# Altium PCB Sensor-Board.PcbDoc
Units mm, origin at the board's own origin, x right, y up, seen from the top; angles counter-clockwise.
Board outline 152.4 x 101.6 mm, 2 copper layers (Top Layer, Bottom Layer); 30 components, 25 nets, 110 pads, 15 vias.
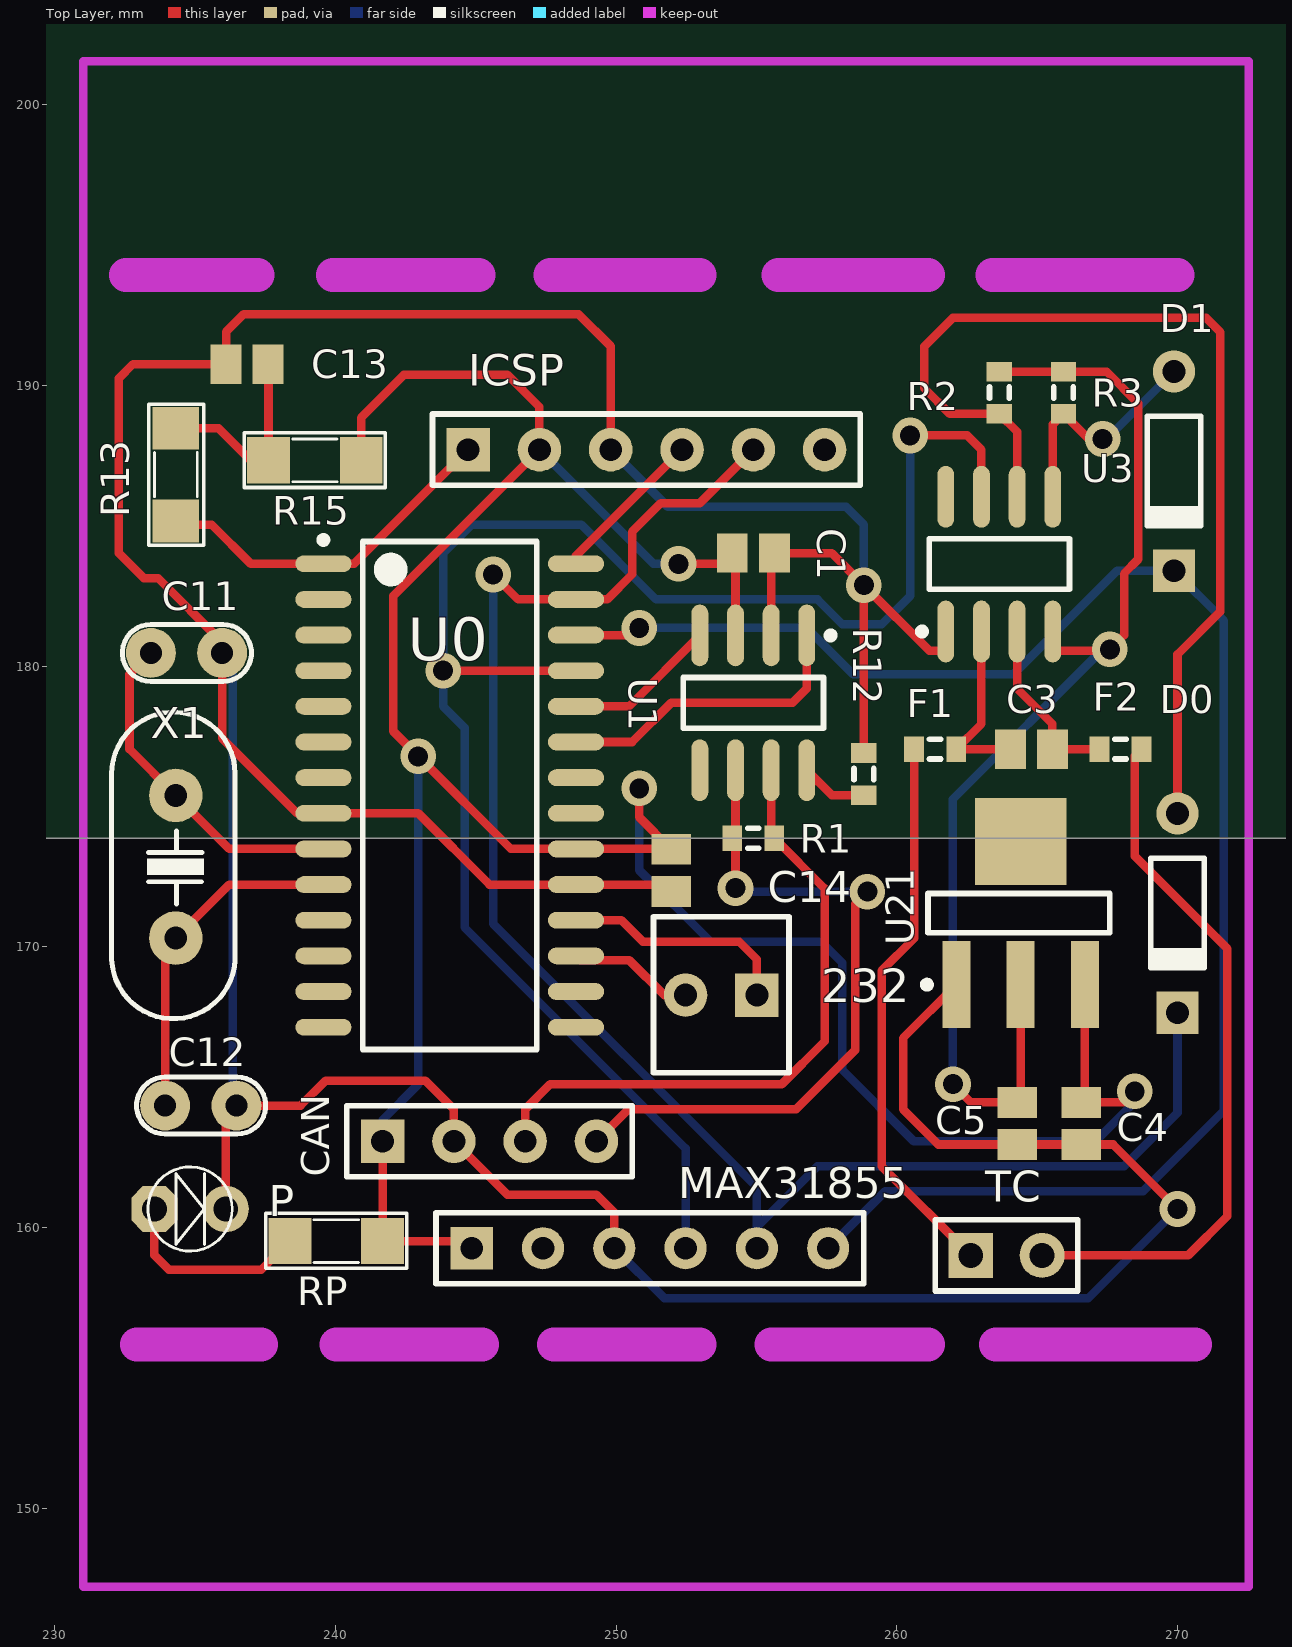
[diagram p0: Top Layer view]
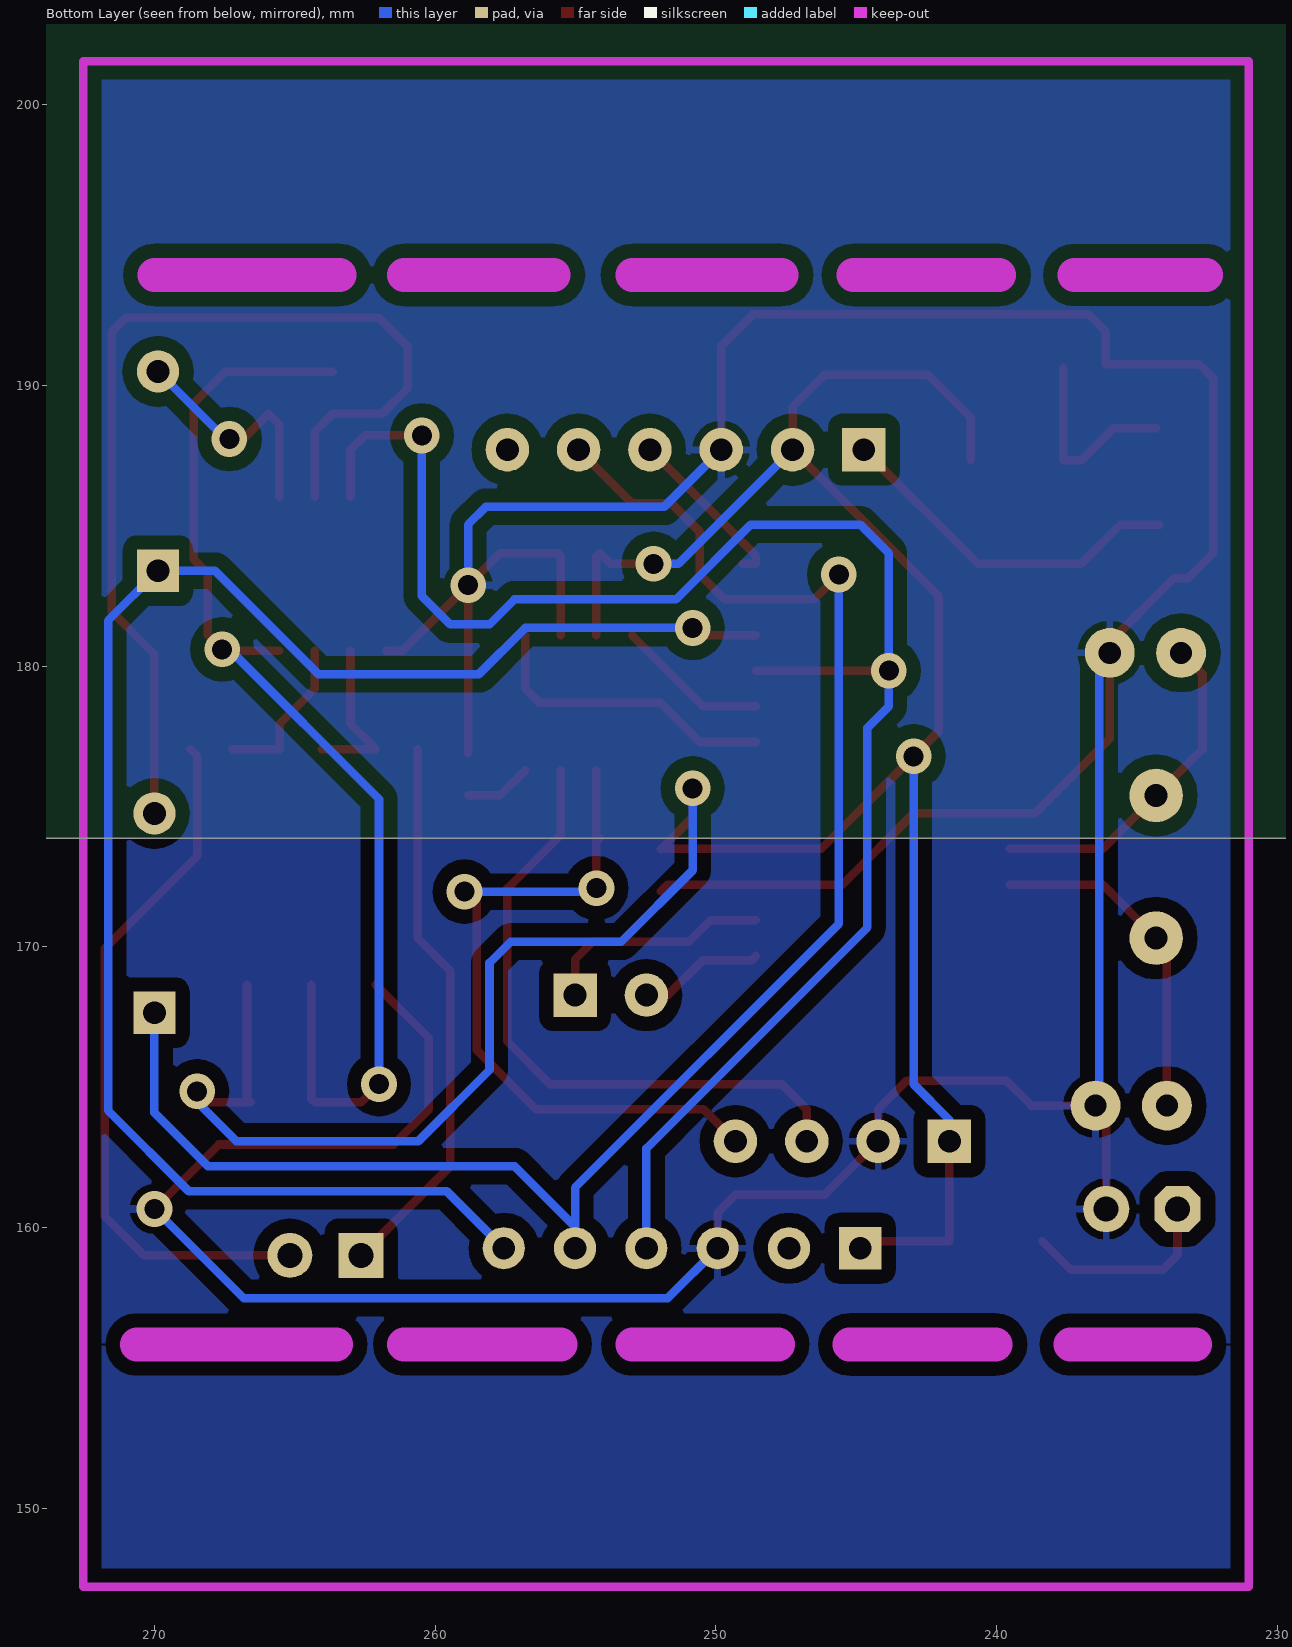
[diagram p1: Bottom Layer view, seen from below]

## Layer stack, top to bottom
Top Solder: solder mask 0.0102, Solder Resist, Dk 3.5
Top Layer: signal copper 0.0356
Dielectric 1: dielectric 0.32, FR-4, Dk 4.8
Bottom Layer: signal copper 0.0356
Bottom Solder: solder mask 0.0102, Solder Resist, Dk 3.5

## Board outline
145.923,173.863 298.323,173.863 298.323,275.463 145.923,275.463

## Design rules (kind name [scope] priority, off if disabled: settings)
Clearance "PolyGon Pour Clearance" [InPolyGon] p1: gap=0.508 ignorepadtopadclearanceinfootprint=FALSE except(0: Arc-Hole Track-Hole SMDPad-Hole THPad-Hole Via-Hole Fill-Hole Poly-Hole Region-Hole Text-Hole)
Clearance [All] p2: gap=0.356 ignorepadtopadclearanceinfootprint=FALSE except(0: Arc-Hole Track-Hole SMDPad-Hole THPad-Hole Via-Hole Fill-Hole Poly-Hole Region-Hole Text-Hole)
PolygonConnect [All] p1: connectstyle=Relief reliefconductorwidth=0.254 reliefentries=4 polygonreliefangle="90 Angle" airgapwidth=0.254
RoomDefinition max31855_sensorion_board [InComponentClass('max31855_sensorion_board')] p1: confinementstyle=ConfineIn formatcopy=TRUE lockcomponents=FALSE outline 299.466,175.387 303.022,175.387 303.022,180.213 299.466,180.213
RoutingVias [All] p1: holewidth=0.711 width=1.27 viastyle="Through Hole" minholewidth=0.711 minwidth=1.27 maxholewidth=0.711 maxwidth=1.27
SolderMaskExpansion [All] p1: expansion=0.102
Width VCC1 [(InNet('VCC1') AND InNet('VCC'))] p1: maxlimit=0.356 minlimit=0.356 preferedwidth=0.356
Width [All] p2: maxlimit=0.305 minlimit=0.305 preferedwidth=0.305
30 further rules are at their usual default settings.

## Components (designator, comment, footprint, x,y, rotation, side; value= is the part's Value field where it differs from the comment)
232 "Header2" HDR2 255.016,168.275 r180 top
C1 "Cap Pol3" C0805 254.889,184.023 r0 top value=0.1uF
C3 "Cap Pol3" C0805 264.795,177.038 r0 top value=0.1uF
C4 "Cap Pol3" C0805 266.573,163.703 r270 top value=10uF
C5 "Cap Pol3" C0805 264.287,163.703 r270 top value=10uF
C11 "22pF" CN1 234.696,180.467 r0 top value=33pF
C12 "22pF" CN1 235.204,164.338 r0 top value=33pF
C13 "Cap Pol3" C0805 236.855,190.754 r180 top value=0.1uF
C14 "Cap Pol3" C0805 251.968,172.72 r270 top value=0.1uF
CAN "Header 4" HDR1X4 241.681,163.068 r0 top
D0 "Diode 1N4148" DO-35 270.002,171.196 r270 top
D1 "Diode 1N4148" DO-35 269.875,186.944 r270 top
F1 "Res3" J1-0603 261.366,177.038 r180 top value=0805
F2 "Res3" J1-0603 267.97,177.038 r0 top value=0805
ICSP "Header 6" HDR1X6#1 244.729,187.706 r0 top
MAX31855 "Header 6" HDR1X6#2 244.856,159.258 r0 top
P "LED" LED-3MM-YELLOW 233.553,160.655 r0 top value="LED 3 ly Single Colour"
R1 "Res3" J1-0603 254.889,173.863 r0 top value=120
R2 "Res3" J1-0603 263.652,189.738 r90 top value=10k
R3 "Res3" J1-0603 265.938,189.738 r90 top value=10k
R12 "Res3" J1-0603 258.826,176.149 r90 top value=0
R13 "470" SM-RES-1206 234.315,188.468 r270 top value="R1/4W - 1K"
R15 "10k" SM-RES-1206 237.617,187.325 r0 top value="R1/4W - 1K"
RP "10k" SM-RES-1206 238.379,159.512 r0 top value="R1/4W - 1K"
TC "JP2" JP2-D1T 262.636,159.004 r0 top
U0 "PIC18F2480T-I/SO" SOIC-SO28_L 244.072,175.387 r0 top
U1 "MCP2551-E/SN" SOIC-SN8_N 254.889,178.689 r270 top
U3 "Component_1" "SOP8 - duplicate" 267.716,179.946 r90 top
U21 "Component_1" SOT229P700X460-4N 264.414,171.196 r90 top
X1 "12Mhz" XT2 234.315,172.847 r90 top value=4Mhz

## Footprints (in the part's own frame and the unit in brackets; to place one, negate y for a bottom-side part, rotate by r counter-clockwise, add the part's x,y. Pads: shape width x height; smd on the part's side, far side on the other; paste and mask are expansions set on the pad)
C0805 [mm] "Chip Capacitor, Body 2.0x1.3mm, IPC High Density"
  rect 1.1x1.4 smd: 1(-0.75,0) 2(0.75,0)
  body extent -1.1,-0.72 1.1,0.72, height 1.4
CN1 [mil]
  round 70 hole 31: 1(-50,0) 2(50,0)
  silkscreen extent -90,-40 91,40, body extent -115,-33 115,33, height 265
DO-35 [mm] "Diode, Axial; Body 3.8 x 1.9 mm (LxDia. max), Lead Dia. 0.53 mm (max)"
  round 1.5 hole 0.813: 1(-3.55,0)
  rect 1.5x1.5 hole 0.813: 2(3.55,0)
  silkscreen extent -1.95,-0.95 2.05,0.95
HDR1X4 [mil] "Connector; Header; 4 Position"
  rect 61x61 hole 32: 1(0,0)
  round 61 hole 32: 2(100,0) 3(200,0) 4(300,0)
  silkscreen extent -50,-50 350,50
HDR1X6#1 [mil] "Connector; Header; 6 Position"
  rect 61x61 hole 32: 1(0,0)
  round 61 hole 32: 2(100,0) 3(200,0) 4(300,0) 5(400,0) 6(500,0)
  silkscreen extent -50,-50 550,50
HDR1X6#2 [mil] "Connector; Header; 6 Position"
  rect 59.06x59.06 hole 32: 1(0,0)
  round 59.06 hole 32: 2(100,0) 3(200,0) 4(300,0) 5(400,0) 6(500,0)
  silkscreen extent -50,-50 550,50
HDR2 [mil] "Connector; Header; 2 Position"
  rect 61x61 hole 32: 1(0,0)
  round 61 hole 32: 2(100,0)
  silkscreen extent -45,-110 145,109, body extent -50,-115 150,113, height 461
J1-0603 [mm] "Chip Resistor, Body 1.6x0.8mm, IPC High Density"
  rect 0.7x0.9 smd: 1(-0.75,0) 2(0.75,0)
  silkscreen extent -0.2,-0.35 0.2,0.35, body extent -0.85,-0.48 0.85,0.48, height 0.9
JP2-D1T [mm] "2 pins, 1 row, straight, gold plating"
  rect 1.6x1.6 hole 0.889: 1(0,0)
  round 1.6 hole 0.889: 2(2.54,0)
  silkscreen extent -1.27,-1.27 3.81,1.27, body extent -1.27,-1.27 3.81,1.27, height 8.54
LED-3MM-YELLOW [mil]
  oct 65x65 hole 35: 1(0,0)
  round 65 hole 35: 2(100,0)
  silkscreen extent -9,-59 109,59, body extent -27,-77 117,80, height 181
SM-RES-1206 [mil]
  rect 60x65 smd: 1(0,0) 2(130,0)
  silkscreen extent -34,-38 164,39, body extent 2,-31 128,32, height 40
SOIC-SN8_N [mm] "SOIC, 8-Leads, Body 4.9x3.8mm, Pitch 1.27mm, IPC Medium Density"
  oval 2.2x0.6 smd: 1(-2.4,1.905) 2(-2.4,0.635) 3(-2.4,-0.635) 4(-2.4,-1.905) 5(2.4,-1.905) 6(2.4,-0.635) 7(2.4,0.635) 8(2.4,1.905)
  silkscreen extent -2.52,-2.5 0.9,2.88, body extent -2,-2.5 2,2.5, height 1.75
SOIC-SO28_L [mm] "SOIC, 28-Leads, Body 17.9x7.5mm, Pitch 1.27mm, IPC High Density"
  oval 2x0.6 smd: 1(-4.5,8.255) 2(-4.5,6.985) 3(-4.5,5.715) 4(-4.5,4.445) 5(-4.5,3.175) 6(-4.5,1.905) 7(-4.5,0.635) 8(-4.5,-0.635) 9(-4.5,-1.905) 10(-4.5,-3.175) 11(-4.5,-4.445) 12(-4.5,-5.715) 13(-4.5,-6.985) 14(-4.5,-8.255) 15(4.5,-8.255) 16(4.5,-6.985) 17(4.5,-5.715) 18(4.5,-4.445) 19(4.5,-3.175) 20(4.5,-1.905) 21(4.5,-0.635) 22(4.5,0.635) 23(4.5,1.905) 24(4.5,3.175) 25(4.5,4.445) 26(4.5,5.715) 27(4.5,6.985) 28(4.5,8.255)
  silkscreen extent -4.62,-9.05 3.1,9.23, body extent -3.8,-9.06 3.8,9.06, height 2.65
"SOP8 - duplicate" [mm]
  oval 2.2x0.6 smd: 1(1.283,5.969) 2(1.283,4.699) 3(1.283,3.429) 4(1.283,2.159) 5(6.083,2.159) 6(6.083,3.429) 7(6.083,4.699) 8(6.083,5.969)
  silkscreen extent 1.16,1.56 4.58,6.94, body extent 1.68,1.56 5.68,6.56, height 1.75
SOT229P700X460-4N [mm] "SOT223, 4-Leads, Body 10,90x7,00mm (avg), Pitch 2,29mm, IPC Medium Density"
  rect 3.1x1 smd: 1(-2.55,2.29) 2(-2.55,0) 3(-2.55,-2.29)
  rect 3.1x3.25 smd: 4(2.55,0)
  silkscreen extent -2.67,-3.17 0.7,3.46, body extent -1.85,-3.43 1.85,3.17, height 4.6
XT2 [mil] "Footpin for Crystal 2 pin"
  round 75 hole 32: 1(-100,0) 2(100,0)
  silkscreen extent -213,-83 217,90, body extent -216,-87 216,90, height 144

## Part data
232: "Header IDC, 2 x 1 Pin Vertical 2.54mm Pitch (Non-Boxed, Male)", Manufacturer="Würth Elektronik eiSos GmbH", partNo=613002143121, ComponentLink1 Description=Manufacturer, ComponentLink1URL=http://www.we-online.com, ComponentLink2 Description=Datasheet, ComponentLink2URL=http://katalog.we-online.de/em/datasheet/6130xx143121.pdf, Created by="Karrer Zheng", Created Date="29 March 2013", NoPins=02
C1 C3 C4 C5 C13 C14: "Polarized Capacitor (Surface Mount)", LatestRevisionDate=29-May-2009, LatestRevisionNote="IPC-7351 Footprint Added.", PackageDescription="Chip Capacitor", PackageReference=C0805, Published=8-Jun-2000, Publisher="Altium Limited"
C11 C12: library part CN0, "Cremic For Xtal 1pF => 100pF"
CAN: "Header, 4-Pin", LatestRevisionDate=17-Jul-2002, LatestRevisionNote="Re-released for DXP Platform.", Publisher="Altium Limited"
D0 D1: "High Conductance Fast Diode", Code_JEDEC=DO-204-AH, ComponentLink1Description="Manufacturer Link", ComponentLink1URL=http://www.fairchildsemi.com/, ComponentLink2Description=Datasheet, ComponentLink2URL=http://www.fairchildsemi.com/ds/1N%2F1N4148.pdf, DatasheetVersion=1997, LatestRevisionDate=17-Jul-2002, LatestRevisionNote="Re-released for DXP Platform.", PackageDescription="Diode, Axial; Body 3.8 x 1.9 mm (LxDia. max), Lead Dia. 0.53 mm (max)", PackageReference=DO-35, Published=8-Jun-2000, Publisher="Altium Limited"
F1 F2 R1 R2 R3 R12: "Resistor", LatestRevisionDate=29-May-2009, LatestRevisionNote="IPC-7351 Footprint Added.", PackageDescription="Chip Resistor", PackageReference=J1-0603, Published=8-Jun-2000, Publisher="Altium Limited"
ICSP MAX31855: "Header, 6-Pin", LatestRevisionDate=17-Jul-2002, LatestRevisionNote="Re-released for DXP Platform.", Publisher="Altium Limited"
P: "LED Single colour Green and Red"
R13 R15 RP: library part R, "Resistor 1/4W"
TC: "WR-PHD 2.54 mm Angled Socket Header", Manufacturer="Würth Elektronik eiSos GmbH", partNo=613002143121, ComponentLink1 Description=Manufacturer, ComponentLink1URL=http://www.we-online.com, ComponentLink2 Description=Datasheet, ComponentLink2URL=http://katalog.we-online.de/em/datasheet/6130xx143121.pdf, Created by="Karrer Zheng", Created Date="29 March 2013", NoPins=02
U0: "Enhanced Flash Microcontroller with ECAN Technology, 10-Bit A/D and nanoWatt Technology, 16K Flash, 28-Pin SOIC, Industrial Temperature Range, Tape and Reel", Supplier Part Number 1=PIC18F2480T-I/SO-ND, Code_JEDEC=MS-013, ComponentLink1Description=Datasheet, ComponentLink1URL=http://ww1.microchip.com/downloads/en/DeviceDoc/39637d.pdf, ComponentLink2Description="Packaging Specification", ComponentLink2URL=http://www.microchip.com/stellent/groups/techpub_sg/documents/packagingspec/en012702.pdf, ComponentLink3Description="Microchip.com Home", ComponentLink3URL=http://www.microchip.com/, DatasheetVersion="revD, Nov-2009", LatestRevisionDate=02-Dec-2009, LatestRevisionNote="Updated to datasheet revision D, Nov-2009", PackageDescription="28-Lead Plastic Small Outline (SO) - Wide 7.50mm Body [SOIC]", PackageReference=SOIC-SO28, PackageVersion="revBB, Aug-2009", Published=29-Jan-2009, Publisher="Altium Limited", Supplier 1=Digi-Key
U1: "High-Speed CAN Transceiver, 8-Pin SOIC, Extended Temperature", Supplier Part Number 1=MCP2551-E/SN-ND, Code_IPC=SOIC127P600-8, Code_JEDEC=MS-012, ComponentLink1Description=Datasheet, ComponentLink1URL=http://ww1.microchip.com/downloads/en/DeviceDoc/21667E.pdf, ComponentLink2Description="Packaging Specification", ComponentLink2URL=http://www.microchip.com/stellent/groups/techpub_sg/documents/packagingspec/en012702.pdf, ComponentLink3Description="Microchip.com Home", ComponentLink3URL=http://www.microchip.com/, DatasheetVersion="revE, Jan-2007", PackageDescription="8-Lead Plastic Small Outline (SN) - Narrow, 3.90mm Body [SOIC]", PackageReference=SOIC-SN8, PackageVersion="revBB, Aug-2009", Published=29-Jan-2009, Publisher="Altium Limited", Supplier 1=Digi-Key, Supplier 2=Farnell, Supplier 3=Farnell, Supplier Part Number 2=1467746, Supplier Part Number 3=4687887
X1: library part XT2, "Crystal, 32.768 KHz, -40 to 85 degC, 3.2 x 1.5 x 0.9 mm SMD"

## Via types
v1: diameter 1.27, hole 0.711, Top Layer to Bottom Layer, 15 vias

## Nets (pads, with @x,y where several pads share a name; then routed paths per layer and width w, separated by ;. In a path a pad name is that pad's centre, name@x,y a point inside that pad or via, vN(x,y) a via of type N, cw(c..) or ccw(c..) an arc to the next point about the centre after c; other vN are vias at no path point)
3.3V: C5.1 R2.2 R3.2 U3.4 U21.2 | length 41.4
  Top Layer w0.305: v1(262.001,165.1) 262.648,164.453 C5.1 264.414,164.58 U21.2 ; R2.2 R3.2 267.474,190.488 268.605,189.357 268.605,183.801 268.097,183.293 268.097,181.102 v1(267.589,180.594) 267.538,180.543 U3.4@265.557,180.543
  Bottom Layer w0.305: v1(262.001,165.1) 262.001,175.26 267.335,180.594 v1(267.589,180.594)
GND1: C1.2 C4.2 C5.2 C11.2 C12.2 C13.2 C14.2 CAN.2 ICSP.3 MAX31855.3 P.2 R12.2 U0.8 U0.19 U1.2 U3.1 U21.1 | length 160.5
  Top Layer w0.305: P.2 236.093,163.957 C12.2 238.76,164.338 239.649,165.227 243.205,165.227 244.221,164.211 CAN.2 246.126,161.163 249.301,161.163 249.936,160.528 MAX31855.3 ; U0.8@239.522,174.752 238.633,174.752 235.966,177.419 C11.2 235.966,180.848 233.68,183.134 233.172,183.134 232.283,184.023 232.283,190.246 232.791,190.754 C13.2 236.105,191.909 236.728,192.532 248.666,192.532 249.809,191.389 ICSP.3 ; U0.8 242.951,174.752 245.491,172.212 U0.19 251.726,172.212 C14.2 ; U1.2 255.524,183.908 C1.2 257.683,184.023 v1(258.826,182.88) ; R12.2 v1(258.826,182.88) ; U3.1@261.747,180.543 261.163,180.543 v1(258.826,182.88) ; U21.1 260.223,166.745 260.223,164.211 261.481,162.953 C5.2 C4.2 267.704,162.953 v1(270.002,160.655)
  Bottom Layer w0.305: C11.2 236.347,180.086 236.347,165.227 ; ICSP.3 251.841,185.674 258.191,185.674 258.826,185.039 v1(258.826,182.88) ; MAX31855.3 251.714,157.48 266.827,157.48 v1(270.002,160.655)
Net232_1: 232.1 U0.18 | length 8.3
  Top Layer w0.305: U0.18 250.19,170.942 250.952,170.18 254.381,170.18 255.016,169.545 232.1
Net232_2: 232.2 U0.17 | length 4.5
  Top Layer w0.305: U0.17 248.724,169.52 250.469,169.52 251.714,168.275 232.2
NetC3_1: C3.1 F1.1 U3.2 | length 5.8
  Top Layer w0.305: U3.2@263.017,180.543 263.017,177.939 F1.1 C3.1
NetC3_2: C3.2 F2.1 U3.3 | length 5.7
  Top Layer w0.305: U3.3@264.287,180.543 264.287,179.197 265.545,177.939 C3.2 F2.1
NetC11_1: C11.1 U0.9 X1.2 | length 12.1
  Top Layer w0.305: C11.1 232.664,179.705 232.664,177.038 X1.2 236.22,173.482 U0.9@239.522,173.482
NetC12_1: C12.1 U0.10 X1.1 | length 12.1
  Top Layer w0.305: C12.1 233.934,169.926 X1.1 236.22,172.212 U0.10@239.522,172.212
NetC13_1: C13.1 R13.1 R15.1 | length 7.1
  Top Layer w0.305: R13.1 235.839,188.468 236.982,187.325 R15.1 C13.1@237.617,190.627
NetCAN_3: CAN.3 R1.2 U1.7 | length 23.3
  Top Layer w0.305: CAN.3 246.761,164.211 247.65,165.1 255.905,165.1 257.429,166.624 257.429,172.073 R1.2 255.524,173.978 U1.7
NetCAN_4: CAN.4 R1.1 U1.6 | length 25.4
  Top Layer w0.305: CAN.4 250.444,164.211 256.413,164.211 258.521,166.319 258.521,171.526 v1(258.953,171.958) ; v1(254.254,172.085) 254.254,173.748 R1.1 254.254,173.978 U1.6
  Bottom Layer w0.305: v1(254.254,172.085) 254.381,171.958 v1(258.953,171.958)
NetD0_1: D0.1 R2.1 U3.6 | length 36.7
  Top Layer w0.305: U3.6 264.287,188.353 R2.1 261.886,188.988 260.985,189.889 260.985,191.389 262.001,192.405 271.018,192.405 271.526,191.897 271.526,181.938 270.002,180.414 D0.1
NetD0_2: D0.2 ICSP.5 MAX31855.5 U0.27 | length 61
  Top Layer w0.305: v1(245.618,183.261) 246.507,182.372 U0.27 249.682,182.372 250.571,183.261 250.571,184.785 251.587,185.801 252.984,185.801 ICSP.5 ; ICSP.5@254.394,187.592 ICSP.5@254.508,187.706
  Bottom Layer w0.305: v1(245.618,183.261) 245.618,170.815 255.016,161.417 255.016,160.02 ; MAX31855.5 255.016,160.02 ; D0.2 270.002,164.084 268.097,162.179 257.175,162.179 255.016,160.02
NetD1_1: D1.1 R3.1 U3.5 | length 8.8
  Top Layer w0.305: U3.5 265.557,188.607 R3.1 266.966,187.96 v1@267.208,187.96 ; D1.1@269.691,190.043 269.748,189.986 D1.1@269.748,190.373
  Bottom Layer w0.305: v1(267.335,188.087) 267.468,188.087 D1.1
NetD1_2: D1.2 MAX31855.6 U0.26 | length 59.7
  Top Layer w0.305: U0.26 250.571,181.102 v1(250.825,181.356)
  Bottom Layer w0.305: v1(250.825,181.356) 256.794,181.356 258.445,179.705 264.16,179.705 267.849,183.394 D1.2 271.653,181.616 271.653,164.166 268.777,161.29 259.588,161.29 MAX31855.6
NetF1_2: F1.2 TC.1 | length 19.8
  Top Layer w0.305: F1.2 260.616,170.295 259.461,169.14 259.461,162.179 TC.1
NetF2_2: F2.2 TC.2 | length 25.3
  Top Layer w0.305: TC.2 270.383,159.004 271.78,160.401 271.78,169.926 268.478,173.228 268.478,176.796 F2.2
NetICSP_1: ICSP.1 R13.2 U0.1 | length 12.8
  Top Layer w0.305: R13.2@234.188,185.039 235.585,185.039 236.982,183.642 U0.1 240.665,183.642 ICSP.1
NetICSP_4: ICSP.4 U0.28 | length 6.6
  Top Layer w0.305: U0.28@249.047,183.642 U0.28 248.572,183.929 ICSP.4
  Bottom Layer w0.305: ICSP.4 ICSP.4@252.349,188.214
NetMAX31855_4: MAX31855.4 U0.25 U3.7 | length 62.2
  Top Layer w0.305: v1(243.84,179.832) U0.25 ; v1(260.477,188.214) 262.509,188.214 263.017,187.706 U3.7
  Bottom Layer w0.305: MAX31855.4 252.476,162.814 244.602,170.688 244.602,177.8 243.84,178.562 v1(243.84,179.832) 243.84,184.023 244.856,185.039 248.758,185.039 251.425,182.372 257.175,182.372 258.064,181.483 259.461,181.483 260.477,182.499 v1(260.477,188.214)
NetP_1: P.1 RP.1 | length 7.1
  Top Layer w0.305: P.1 233.553,159.004 234.061,158.496 237.363,158.496 RP.1
NetR12_1: R12.1 U1.8 | length 2.4
  Top Layer w0.305: U1.8 257.684,175.399 R12.1
NetU0_23: U0.23 U1.1 | length 10.9
  Top Layer w0.305: U0.23 250.571,177.292 251.968,178.689 256.286,178.689 256.794,179.197 U1.1
NetU0_24: U0.24 U1.4 | length 5.5
  Top Layer w0.305: U0.24 250.457,178.562 U1.4
VCC1: C1.1 C4.1 C14.1 CAN.1 ICSP.2 MAX31855.1 R15.2 RP.2 U0.20 U1.3 U21.3 | length 103.8
  Top Layer w0.305: R15.2 240.919,188.849 242.443,190.373 246.126,190.373 247.269,189.23 ICSP.2 242.062,182.499 242.062,177.673 v1(242.951,176.784) 246.253,173.482 U0.20 C14.1@251.956,173.482 ; CAN.1 RP.2 244.602,159.512 MAX31855.1 ; v1(250.825,175.641) 250.825,174.613 C14.1@251.956,173.482 ; C14.1 C14.1@251.956,173.482 ; v1(252.222,183.642) 253.758,183.642 C1.1 254.254,183.908 U1.3 ; U21.3 266.704,164.584 C4.1 268.085,164.453 v1(268.478,164.846)
  Bottom Layer w0.305: CAN.1 241.681,163.83 242.951,165.1 v1(242.951,176.784) ; ICSP.2 251.333,183.642 v1(252.222,183.642) ; v1(250.825,175.641) 250.825,172.72 253.365,170.18 257.302,170.18 258.064,169.418 258.064,165.608 260.604,163.068 267.081,163.068 268.478,164.465 v1(268.478,164.846)
pads on no net: ICSP.6 MAX31855.2 U0.2 U0.3 U0.4 U0.5 U0.6 U0.7 U0.11 U0.12 U0.13 U0.14 U0.15 U0.16 U0.21 U0.22 U1.5 U3.8 U21.4

## Polygon pours and split planes (outlines as drawn)
GND1 on Bottom Layer "Bottom Layer-No Net" (solid, pour order 0): 231.013,201.486 231.076,201.549 272.415,201.549 272.415,147.32 272.288,147.193 231.14,147.193 231.14,201.422 231.267,201.549

## Keep-outs
Keep-Out Layer:
  lines w0.305: 231.013,147.193 231.013,155.575 231.013,193.421 231.013,201.422 231.013,201.549 272.542,201.549 272.542,147.193 231.013,147.193
  lines w1.2: 232.537,193.929 237.236,193.929 ; 232.918,155.829 237.363,155.829 ; 239.903,193.929 245.11,193.929 ; 240.03,155.829 245.237,155.829 ; 247.65,193.929 252.984,193.929 ; 247.777,155.829 252.984,155.829 ; 255.524,155.829 261.112,155.829 ; 255.778,193.929 261.112,193.929 ; 263.398,193.929 270.002,193.929 ; 263.525,155.829 270.637,155.829